# EAGLE board ArdustatV8_details (EAGLE 5.11)
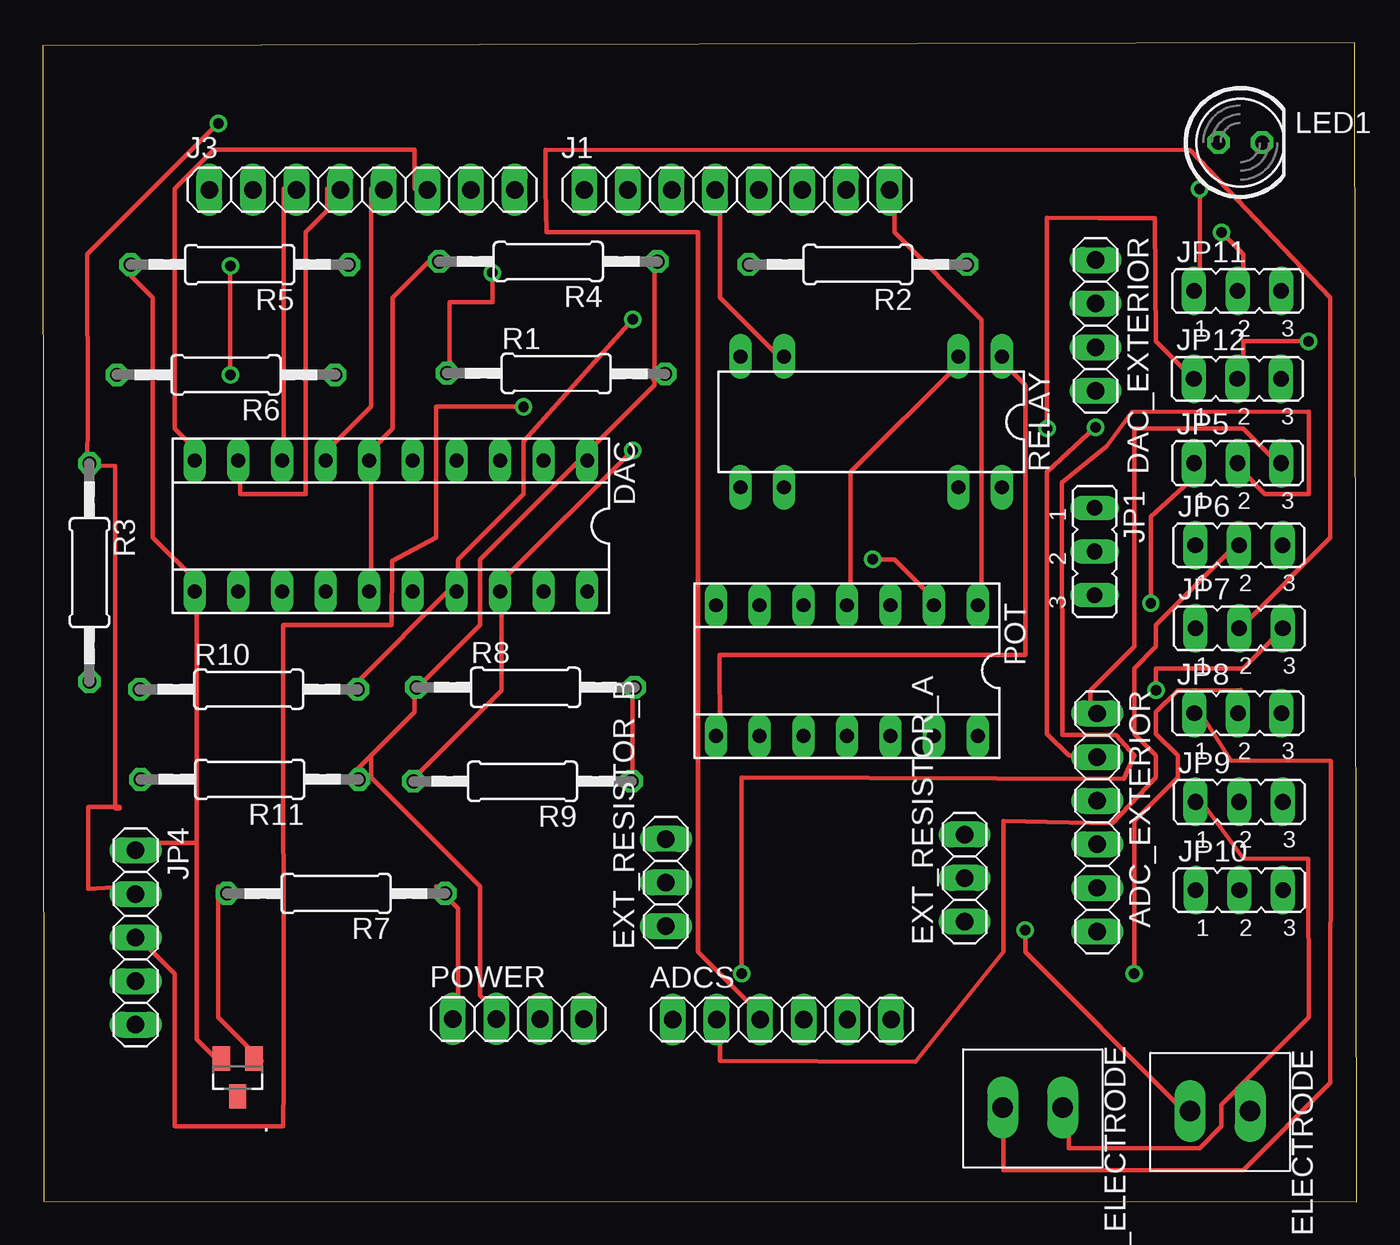
[diagram p0: board, top side]
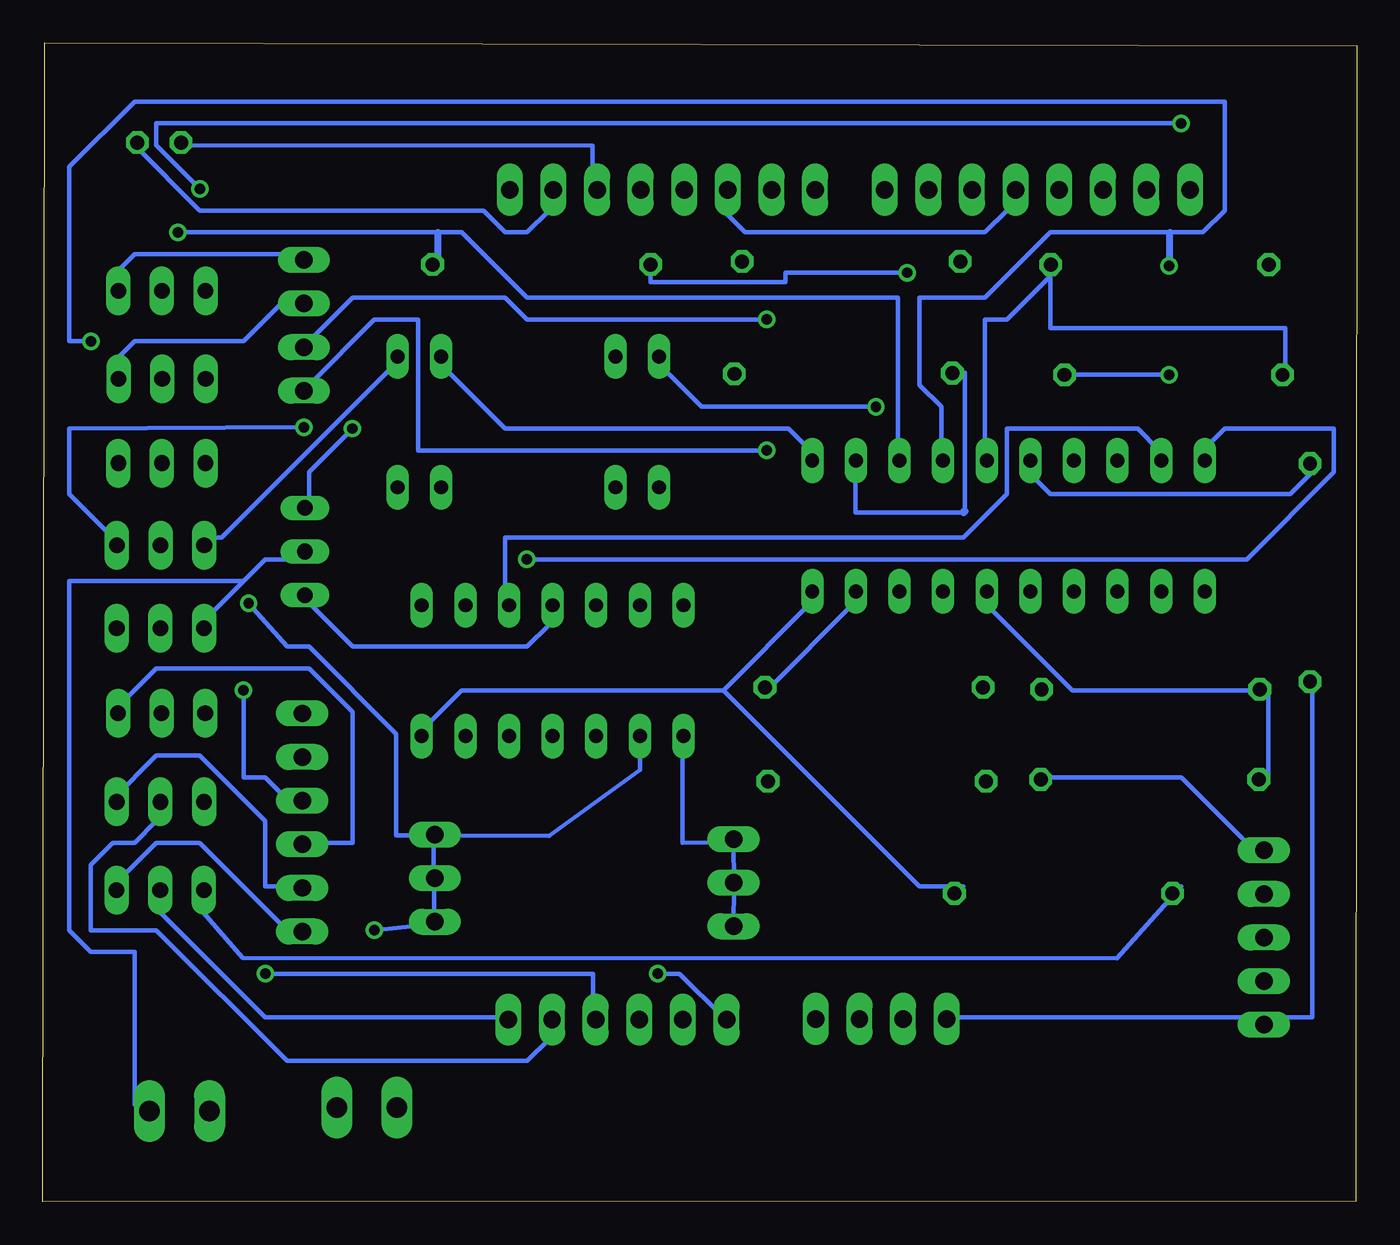
[diagram p1: board, bottom side, seen from below]

Size 76.5 x 67.5 mm. Coordinates in mm from the lower left corner, seen from the top.
Outline: 0.05,0.05 76.5,0 76.4,67.5 0,67.35 0.05,0.05
Copper layers (1*16): Top 0.035mm / dielectric 1.5mm / Bottom 0.035mm
Design rules "default *": minimum track width 10mil, minimum drill 24mil, track to track 10mil, track to pad 10mil, pad to pad 10mil, via to via 10mil, smd to smd 8mil, copper to edge 40mil, drill to drill 20mil, minimum pad ring 10mil, minimum via ring 8mil, stop-mask expansion 4mil, vias tented up to drill 0mil, thermal gap 10mil

## Footprints (pad centres in the part's own frame; a part is rotated, then mirrored left to right if it is on the bottom)
SOT23 = smd 1 x 1.4: 1 -0.95,-1.1; 2 0.95,-1.1; 3 0,1.1
1X06 = drill 1.016 long: 1 -6.35,0; 2 -3.81,0; 3 -1.27,0; 4 1.27,0; 5 3.81,0; 6 6.35,0
SOCKET-20 = drill 0.813 long: 1 -11.43,-3.81; 2 -8.89,-3.81; 3 -6.35,-3.81; 4 -3.81,-3.81; 5 -1.27,-3.81; 6 1.27,-3.81; 7 3.81,-3.81; 8 6.35,-3.81; 9 8.89,-3.81; 10 11.43,-3.81; 11 11.43,3.81; 12 8.89,3.81; 13 6.35,3.81; 14 3.81,3.81; 15 1.27,3.81; 16 -1.27,3.81; 17 -3.81,3.81; 18 -6.35,3.81; 19 -8.89,3.81; 20 -11.43,3.81
1X04 = drill 1.016 long: 1 -3.81,0; 2 -1.27,0; 3 1.27,0; 4 3.81,0
SPARK_SCREW_TERM = drill 1.2 long: 1 0,-1.8; 2 0,1.7
1X03 = drill 1.016 long: 1 -2.54,0; 2 0,0; 3 2.54,0
1X08 = drill 1.016 long: 1 -8.89,0; 2 -6.35,0; 3 -3.81,0; 4 -1.27,0; 5 1.27,0; 6 3.81,0; 7 6.35,0; 8 8.89,0
JP2 = drill 0.914 long: 1 -2.54,0; 2 0,0; 3 2.54,0
1X05 = drill 1.016 long: 1 -5.08,0; 2 -2.54,0; 3 0,0; 4 2.54,0; 5 5.08,0
LED5MM = drill 0.813 octagon: A -1.27,0; K 1.27,0
SOCKET-14 = drill 0.813 long: 1 -7.62,-3.81; 2 -5.08,-3.81; 3 -2.54,-3.81; 4 0,-3.81; 5 2.54,-3.81; 6 5.08,-3.81; 7 7.62,-3.81; 8 7.62,3.81; 9 5.08,3.81; 10 2.54,3.81; 11 0,3.81; 12 -2.54,3.81; 13 -5.08,3.81; 14 -7.62,3.81
0207/12 = drill 0.813 octagon: 1 -6.35,0; 2 6.35,0
DIL14/8 = drill 0.813 long: 1 -7.62,-3.81; 2 -5.08,-3.81; 6 5.08,-3.81; 7 7.62,-3.81; 8 7.62,3.81; 9 5.08,3.81; 13 -5.08,3.81; 14 -7.62,3.81

## Placement (x,y rotation side)
.  2.5 V Reference  [SOT23]  11.34,7.25 180 top
ADC_EXTERIOR  ADC A0(1)->A5(6)  [1X06]  61.4,22.1 270 top
ADCS  Bottom-Right Header, A0(1)->A5(6)  [1X06]  43.04,10.63 0 top
DAC  [SOCKET-20]  20.27,39.37 180 top
DAC_EXTERIOR  DAC A(1)->D(4)  [1X04]  61.3,51.05 270 top
ELECTRODE  SPARK_SCREW_TERM  [SPARK_SCREW_TERM]  68.6,5.29 270 top
EXT_RESISTOR_A  [1X03]  53.68,18.86 90 top
EXT_RESISTOR_B  [1X03]  36.28,18.6 90 top
J1  Top-Right Header 0(8)->7(1)  [1X08]  40.42,58.95 0 top
J3  Top-Left Header 8(8)->Aref(1)  [1X08]  18.58,58.95 0 top
JP1  Ground PIN  [JP2]  61.25,37.88 270 top
JP4  External Op-Amp  [1X05]  5.4,15.4 270 top
JP5  [JP2]  69.57,43.03 0 top
JP6  [JP2]  69.65,38.24 0 top
JP7  [JP2]  69.66,33.42 0 top
JP8  [JP2]  69.59,28.46 0 top
JP9  [JP2]  69.66,23.3 0 top
JP10  [JP2]  69.67,18.16 0 top
JP11  [JP2]  69.57,53.06 0 top
JP12  [JP2]  69.56,47.94 0 top
LED1  [LED5MM]  69.73,61.7 0 top
POT  [SOCKET-14]  46.82,30.94 180 top
POWER  Bottom-Left Header 5V(1) GND(2)  [1X04]  27.68,10.66 0 top
R1  10K  [0207/12]  29.89,48.25 359.8 top
R2  10K  [0207/12]  47.46,54.6 180 top
R3  100  [0207/12]  2.71,36.65 270 top
R4  100  [0207/12]  29.43,54.77 180 top
R5  10K  [0207/12]  11.46,54.59 180 top
R6  10K  [0207/12]  10.66,48.17 180 top
R7  10K  [0207/12]  17.07,17.97 180 top
R8  10K  [0207/12]  28.1,29.97 0 top
R9  10K  [0207/12]  27.93,24.5 180 top
R10  10K  [0207/12]  11.99,29.86 0 top
R11  10K  [0207/12]  12.04,24.61 180 top
REFERENCE_AND_SENSE_ELECTRODE  SPARK_SCREW_TERM  [SPARK_SCREW_TERM]  57.69,5.5 270 top
RELAY  [DIL14/8]  48.23,45.43 180 top

## Library data of the parts
. = linear
ADC_EXTERIOR ADCS DAC_EXTERIOR EXT_RESISTOR_A EXT_RESISTOR_B J1 J3 JP4 POWER = pinhead
DAC ELECTRODE POT REFERENCE_AND_SENSE_ELECTRODE RELAY = ardustat
JP1 JP5-JP12 = jumper
LED1 = led
R1-R11 = rcl

## Nets
DACA: DAC.3 JP11.2 R2.1
DACB: JP1.1 JP12.1
GND: ..2 DAC.1 DAC.11 JP1.3 JP4.1 POT.4 POWER.2 R1.2 R4.1 R5.2 R8.1 R11.1 RELAY.2
N$1: DAC.6 DAC.15 R3.1 R4.2
N$2: DAC.10 J3.6 POT.2
N$3: DAC.9 J3.4 POT.3
N$4: DAC.8 J3.3
N$5: DAC.7 J1.3 J3.5
N$6: J1.4 RELAY.6
N$7: DAC.2 R1.1 R2.2
N$8: ADCS.1 JP5.2
N$9: J1.8 POT.1
N$10: ADC_EXTERIOR.1 JP5.3
N$11: ADCS.2 JP6.2
N$12: DAC.5 R5.1 R6.2
N$13: ..3
N$14: JP4.4
N$15: JP4.3 RELAY.7
N$16: ADC_EXTERIOR.2 JP6.3
N$17: J1.6 LED1.A
N$18: J1.7 LED1.K
N$19: ADCS.3 JP7.2
N$20: ADC_EXTERIOR.3 JP7.3
N$21: JP8.1 REFERENCE_AND_SENSE_ELECTRODE.1
N$22: ADC_EXTERIOR.4 JP8.3
N$23: JP9.1 REFERENCE_AND_SENSE_ELECTRODE.2
N$24: ADC_EXTERIOR.5 JP9.3
N$25: ..1 JP10.1 R7.2
N$26: ADC_EXTERIOR.6 JP10.3
N$27: DAC_EXTERIOR.1 JP11.3
N$28: JP4.2 JP11.1
N$29: DAC.4 JP12.2 R6.1
N$30: DAC_EXTERIOR.2 JP12.3
N$31: DAC.18 DAC_EXTERIOR.4 R9.2
N$32: DAC.19 R8.2 R9.1
N$33: DAC.16 R10.1 R11.2
N$34: DAC.17 DAC_EXTERIOR.3 R10.2
PIN1ADC: ELECTRODE.1 EXT_RESISTOR_A.1 EXT_RESISTOR_A.2 EXT_RESISTOR_A.3 JP5.1 POT.9
PIN2ADC: EXT_RESISTOR_B.1 EXT_RESISTOR_B.2 EXT_RESISTOR_B.3 JP6.1 POT.8 RELAY.1
PIN3ADC: ELECTRODE.2 JP1.2 JP7.1
PIN4ADC: ADCS.4 JP8.2
PIN6ADC: ADCS.6 JP10.2
SENSE: ADCS.5 JP9.2
V+: DAC.20 JP4.5 POT.14 POWER.1 R3.2 R7.1

## Tracks (layer width: path | path; a pad name or v marks a point on that pad's centre or on a via)
DACA  (via drill 0.61)
  Top 0.254: v68.63,56.47 69.9,55.2 69.9,52.66 JP11.2
  Bottom 0.254: v68.63,56.47 53.51,56.47 52.12,56.47 48.31,52.66 26.72,52.66 26.72,43.77 DAC.3
  Bottom 0.406: R2.1 53.51,54.6 53.51,56.47
DACB  (via drill 0.61)
  Top 0.254: v58.47,45.04 58.46,46.88 58.46,57.31 61.46,57.3 64.76,57.3 64.82,50.12 67.36,47.58 JP12.1
  Bottom 0.254: v58.47,45.04 61.01,42.5 61.01,39.96 JP1.1
GND
  Top 0.254: 8.94,20.91 8.94,36.15 | 8.94,20.91 8.94,9.48 10.21,8.21 ..2 | 8.94,36.15 6.4,38.69 6.4,52.66 5.13,53.93 R5.2 | 8.94,36.15 DAC.11 | 8.94,20.91 5.13,20.91 JP4.1 | RELAY.2 53.39,48.85 47.04,42.5 47.04,34.88 POT.4 | 31.8,43.77 35.61,47.58 35.61,47.95 35.61,55.2 R4.1 | 19.1,25.99 21.64,28.53 21.64,29.8 | 19.1,25.99 17.83,24.72 R11.1 | 19.1,25.99 19.1,24.72 25.45,18.37 25.45,12.02 26.72,10.75 POWER.2 | 31.8,43.77 25.45,37.42 25.45,33.61 21.64,29.8 | 31.8,43.77 DAC.1 | 21.64,29.8 R8.1
  Top 0.406: R1.2 35.61,48.23 35.61,47.95
  Bottom 0.254: POT.4 47.04,33.61 48.31,32.34 58.47,32.34 61.01,34.88 JP1.3 | RELAY.2 53.39,48.85 49.58,45.04 33.07,45.04 31.8,43.77 DAC.1 | JP4.1 6.4,20.91 10.21,24.72 17.83,24.72 R11.1
N$1
  Top 0.254: 19.1,43.77 19.1,36.15 DAC.15 | 19.1,43.77 20.37,45.04 20.37,52.66 22.91,55.2 R4.2 | DAC.6 19.1,43.77
  Bottom 0.254: R3.1 2.59,42.5 3.86,41.23 17.83,41.23 19.1,42.5 DAC.6
N$2  (via drill 0.61)
  Top 0.254: DAC.10 8.94,43.77 7.67,45.04 7.67,59.01 9.94,61.28 21.64,61.28 21.64,59.01 J3.6 | v48.31,37.42 49.58,37.42 52.12,34.88 POT.2
  Bottom 0.254: v48.31,37.42 6.4,37.42 1.32,42.5 1.32,45.04 7.67,45.04 8.94,43.77 DAC.10
N$3
  Top 0.254: DAC.9 11.48,43.77 11.48,41.23 15.29,41.23 15.29,56.47 16.56,57.74 16.56,59.01 J3.4
  Bottom 0.254: POT.3 49.58,34.88 49.58,38.69 22.91,38.69 20.37,41.23 20.37,45.04 12.75,45.04 11.48,43.77 DAC.9
N$4
  Top 0.254: DAC.8 14.02,43.77 14.02,59.01 J3.3
N$5
  Top 0.254: DAC.7 16.56,43.77 19.1,46.31 19.1,59.01 J3.5
  Bottom 0.254: J1.3 36.88,57.74 35.61,56.47 21.64,56.47 20.37,57.74 J3.5
N$6
  Top 0.254: RELAY.6 43.23,48.85 39.42,52.66 39.42,59.01 J1.4
N$7  (via drill 0.61 pad 1.02)
  Top 0.254: 23.68,48.27 23.68,52.41 26.18,52.41 v26.18,54.12
  Top 0.406: R1.1 23.68,48.27
  Bottom 0.254: v26.18,54.12 33.26,54.12 33.26,53.56 41.11,53.56 R2.2 | 29.19,43.18 29.19,40.15 22.87,40.15 | 22.8,40.23 22.8,48.31 23.54,48.31
  Bottom 0.406: 29.19,43.18 DAC.2 | 22.87,40.15 22.87,40.23 22.8,40.23 | 23.54,48.31 R1.1
N$8  (via drill 0.61)
  Top 0.254: v40.69,13.29 40.69,24.72 62.95,24.63 63.55,25.99 62.49,27.19 59.37,27.2 59.34,41.9 61.96,44.03 63.42,46 73.71,46.02 73.71,41.23 71.17,41.23 69.9,42.5 JP5.2
  Bottom 0.254: v40.69,13.29 39.42,13.29 36.88,10.75 ADCS.1
N$9
  Top 0.254: POT.1 54.66,34.88 54.66,51.39 49.58,56.47 49.58,59.01 J1.8
N$10
  Top 0.254: JP5.3 72.44,42.5 69.9,45.04 63.55,45.04 63.55,32.34 61.01,29.8 61.01,28.53 ADC_EXTERIOR.1
N$11
  Top 0.254: JP6.2 69.9,38.69 64.82,33.61 64.82,32.34 63.55,31.07 63.55,27.26 64.82,25.99 64.82,24.72 62.28,22.05 55.93,22.18 55.93,14.56 50.81,8.15 39.44,8.22 39.42,10.75 ADCS.2
N$12
  Bottom 0.254: 17.83,53.93 20.37,51.39 21.64,51.39 21.64,43.77 DAC.5 | 17.83,53.93 R5.1 | 4.14,48.17 4.14,50.89 17.83,50.89 17.83,53.93
  Bottom 0.406: R6.2 4.14,48.17
N$15  (via drill 0.61)
  Top 0.254: v27.99,46.31 22.91,46.31 22.91,38.69 20.34,37.32 20.3,33.61 13.98,33.61 14.02,6.94 14,4.4 7.67,4.4 7.67,13.29 5.13,15.83 JP4.3
  Bottom 0.254: v27.99,46.31 38.15,46.31 40.69,48.85 RELAY.7
N$16  (via drill 0.61)
  Top 0.254: v61.29,45.12 58.47,42.5 58.47,27.26 59.74,25.99 61.01,25.99 ADC_EXTERIOR.2
  Bottom 0.254: v61.29,45.12 74.98,45.04 74.98,41.23 72.44,38.69 JP6.3
N$17
  Bottom 0.254: LED1.A 68.63,61.55 44.5,61.51 44.5,59.01 J1.6
N$18
  Bottom 0.254: LED1.K 71.17,61.55 67.36,57.74 50.85,57.74 49.58,56.47 48.31,56.47 47.04,57.74 J1.7
N$19
  Top 0.254: JP7.2 69.9,33.61 74.98,38.69 74.98,52.66 66.82,61.25 29.26,61.28 29.26,59.01 29.32,56.47 38.15,56.47 38.15,14.56 41.96,10.75 ADCS.3
N$20  (via drill 0.61)
  Top 0.254: v64.82,29.8 64.82,31.07 69.9,31.07 72.44,33.61 JP7.3
  Bottom 0.254: v64.82,29.8 64.82,24.72 63.55,24.72 62.28,23.45 ADC_EXTERIOR.3
N$21
  Top 0.254: JP8.1 67.36,28.53 69.17,25.72 75.01,25.69 74.98,6.94 69.9,1.86 55.93,1.86 55.93,5.67 REFERENCE_AND_SENSE_ELECTRODE.1
N$22
  Bottom 0.254: JP8.3 72.44,28.53 69.9,31.07 61.01,31.07 58.47,28.53 58.47,20.91 61.01,20.91 ADC_EXTERIOR.4
N$23
  Top 0.254: JP9.1 67.36,23.45 69.91,20.01 73.68,19.98 73.71,10.75 68.63,5.67 68.63,4.4 67.36,3.13 59.74,3.13 59.74,5.67 REFERENCE_AND_SENSE_ELECTRODE.2
N$24
  Bottom 0.254: JP9.3 72.44,23.45 69.9,25.99 67.36,25.99 63.55,22.18 63.55,18.37 62.28,18.37 ADC_EXTERIOR.5
N$25
  Top 0.254: ..1 12.75,8.21 10.21,10.75 10.21,18.37 R7.2
  Bottom 0.254: JP10.1 67.36,17.1 64.87,14.21 13.96,14.19 10.21,18.37 R7.2
N$26
  Bottom 0.254: JP10.3 72.44,18.37 69.9,20.91 67.36,20.91 62.28,15.83 ADC_EXTERIOR.6
N$27
  Bottom 0.254: JP11.3 72.44,53.93 71.17,55.2 62.28,55.2 DAC_EXTERIOR.1
N$28  (via drill 0.61)
  Top 0.254: v67.36,59.01 67.36,52.66 JP11.1 | v10.21,62.82 2.59,55.2 2.62,45.63 2.58,42.88 4.21,42.87 4.21,22.91 4.46,22.91 4.46,23 2.63,23 2.63,18.24 2.64,18.24 5.13,18.37 JP4.2
  Bottom 0.254: v67.36,59.01 69.9,61.55 69.9,62.82 v10.21,62.82
N$29  (via drill 0.61, 0.61 pad 1.02)
  Top 0.254: v73.71,50.12 69.9,50.12 69.9,47.58 JP12.2 | v10.91,48.18 v10.91,54.51
  Bottom 0.254: v73.71,50.12 74.98,50.12 74.98,60.28 71.17,64.09 7.67,64.09 7.67,57.74 8.94,56.47 10.87,56.47 17.83,56.47 21.64,52.66 25.45,52.66 25.45,47.58 24.18,46.31 24.18,43.77 DAC.4 | v10.91,48.17 R6.1
  Bottom 0.406: v10.91,48.18 v10.91,48.17 | v10.91,54.51 10.87,54.51 10.87,56.47
N$30
  Bottom 0.254: JP12.3 72.44,48.85 71.17,50.12 64.82,50.12 62.28,52.66 DAC_EXTERIOR.2
N$31  (via drill 0.61)
  Top 0.254: 26.72,36.15 26.72,29.8 21.64,24.72 R9.2 | 26.72,36.15 v34.34,43.77 | 26.72,36.15 DAC.18
  Bottom 0.254: v34.34,43.77 54.66,43.77 54.66,51.39 57.2,51.39 61.01,47.58 DAC_EXTERIOR.4
N$32
  Top 0.254: R9.1 34.34,24.72 34.34,29.8 R8.2
  Bottom 0.254: DAC.19 29.26,34.88 34.34,29.8 R8.2
N$33
  Bottom 0.254: 5.13,29.8 5.13,24.72 R11.2 | 5.13,29.8 16.56,29.8 21.64,34.88 DAC.16 | 5.13,29.8 R10.1
N$34  (via drill 0.61)
  Top 0.254: 24.18,36.15 17.83,29.8 R10.2 | v34.34,51.39 27.99,44.28 27.99,41.23 24.18,37.42 24.18,36.15 | 24.18,36.15 DAC.17
  Bottom 0.254: v34.34,51.39 48.31,51.39 49.58,52.66 58.47,52.66 61.01,50.12 DAC_EXTERIOR.3
PIN1ADC  (via drill 0.61)
  Top 0.254: v57.2,15.83 57.2,14.56 66.09,5.67 ELECTRODE.1 | v64.52,34.86 64.52,39.91 67.36,42.5 JP5.1
  Bottom 0.254: 53.73,16.19 53.73,18.73 EXT_RESISTOR_A.2 53.74,18.41 53.74,21.35 | 53.73,16.19 v57.2,15.83 | 53.73,16.19 EXT_RESISTOR_A.1 | 53.74,21.35 47.04,21.31 41.74,25.15 POT.9 | v64.52,34.86 62.28,32.34 61.01,32.34 55.93,27.26 55.93,21.35 54.66,21.35 EXT_RESISTOR_A.3 53.74,21.35
PIN2ADC
  Top 0.254: POT.8 39.42,27.26 39.39,31.85 57.2,31.85 57.2,47.58 55.93,48.85 RELAY.1
  Bottom 0.254: 36.22,18.51 36.31,15.97 EXT_RESISTOR_B.1 | 36.3,20.96 39.24,20.91 39.24,25.99 POT.8 | 36.22,18.51 36.3,20.96 | 36.22,18.51 EXT_RESISTOR_B.2 | 36.3,20.96 EXT_RESISTOR_B.3 | RELAY.1 55.93,48.85 66.09,38.69 67.36,38.69 JP6.1
PIN3ADC
  Bottom 0.254: 64.82,36.15 63.55,37.42 62.28,37.42 JP1.2 | 64.82,36.15 67.36,33.61 JP7.1 | 64.82,36.15 74.98,36.15 74.98,15.83 73.71,14.56 71.17,14.56 71.17,5.67 ELECTRODE.2
PIN4ADC  (via drill 0.61)
  Top 0.254: v63.55,13.29 63.55,22.18 66.09,24.72 66.09,25.99 64.82,27.26 64.82,28.53 66.09,29.8 67.36,29.8 69.75,29.81 69.9,28.53 JP8.2
  Bottom 0.254: v63.55,13.29 44.47,13.29 44.5,10.75 ADCS.4
PIN6ADC
  Bottom 0.254: JP10.2 69.9,17.1 63.55,10.75 49.58,10.75 ADCS.6
SENSE
  Bottom 0.254: JP9.2 69.9,22.18 71.17,20.91 72.44,20.91 73.71,19.64 73.71,15.83 69.9,15.83 62.28,8.21 48.31,8.21 47.04,9.48 ADCS.5
V+
  Top 0.254: R7.1 22.91,18.37 24.18,17.1 24.18,10.75 POWER.1
  Bottom 0.254: 36.88,29.8 31.8,34.88 DAC.20 | 36.88,29.8 52.12,29.8 54.66,27.26 POT.14 | R3.2 2.59,29.8 2.59,10.75 5.13,10.75 JP4.5 6.4,10.75 24.18,10.75 POWER.1 | 36.88,29.8 25.45,18.37 22.91,18.37 R7.1